# Altium PCB Anahata_Control_PCB.PcbDoc
Units mm, origin at the board's own origin, x right, y up, seen from the top; angles counter-clockwise.
Board outline 21.04 x 34.42 mm, 4 copper layers (Top Layer, Layer 1, Layer 2, Bottom Layer), stack 0.603 mm thick; 34 components, 48 nets, 137 pads, 36 vias.
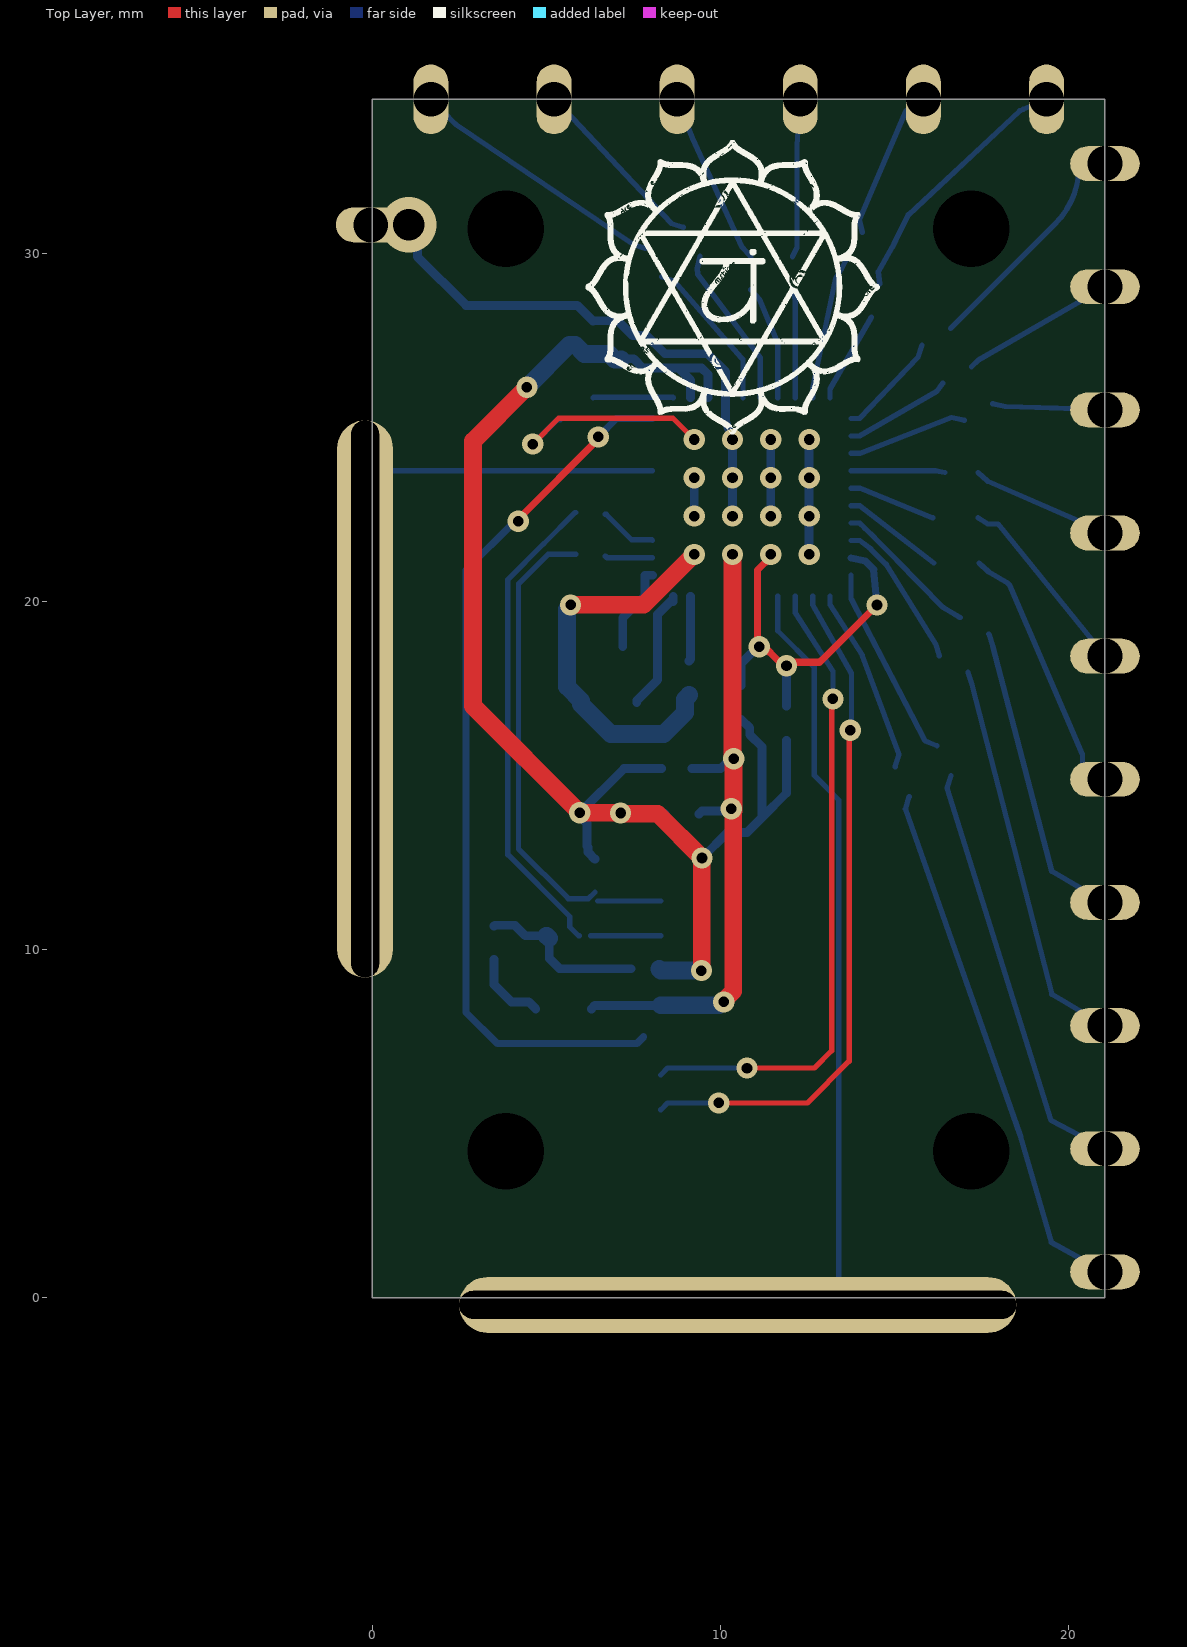
[diagram p0: Top Layer view]
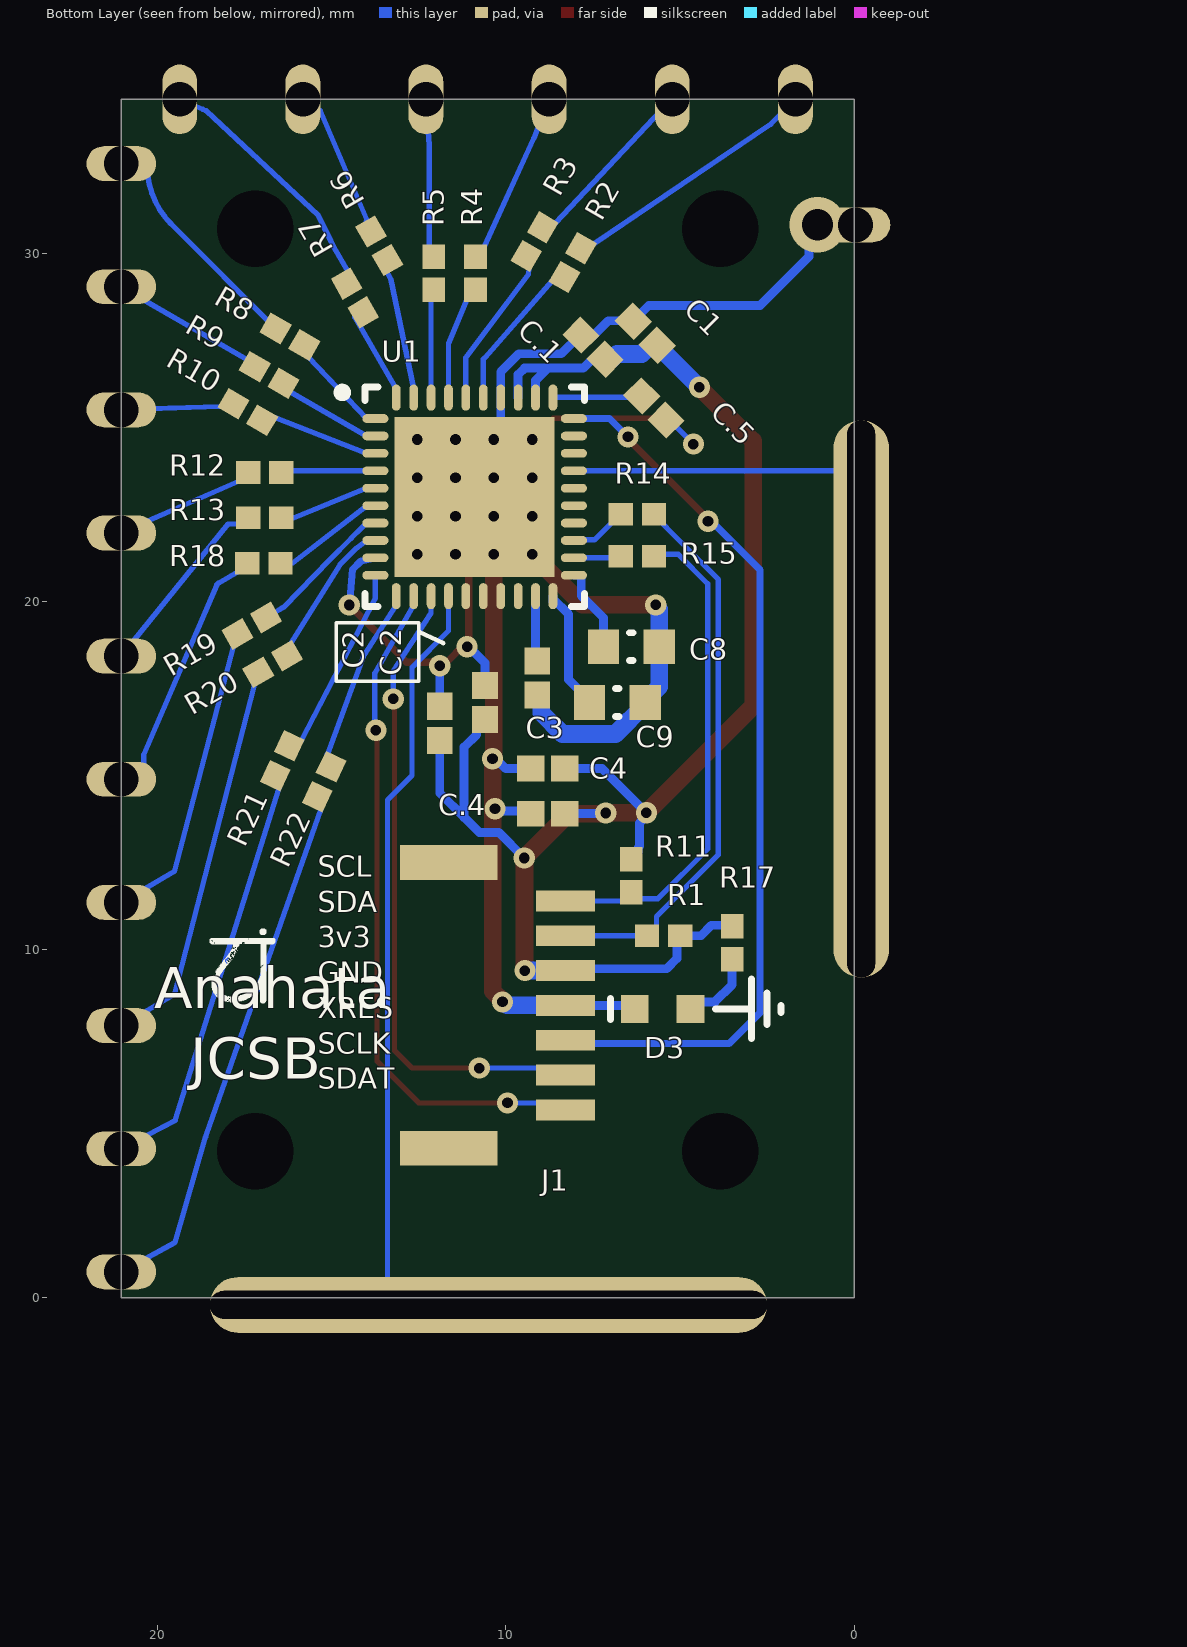
[diagram p1: Bottom Layer view, seen from below]

## Layer stack, top to bottom
Top Solder: solder mask 0.0102, Solder Resist, Dk 3.5
Top Layer: signal copper 0.0356
Dielectric 2: prepreg 0.0711, PP-006, Dk 4.1
Layer 1: signal copper 0.035
Dielectric 1: dielectric 0.32, FR-4, Dk 4.8
Layer 2: signal copper 0.035
Dielectric 3: prepreg 0.0711, PP-006, Dk 4.1
Bottom Layer: signal copper 0.0356
Bottom Solder: solder mask 0.0102, Solder Resist, Dk 3.5

## Board outline
0,0 21.044,0 21.044,34.417 0,34.417

## Design rules (kind name [scope] priority, off if disabled: settings)
BoardOutlineClearance [All] p1: gap=0.254 ignorepadtopadclearanceinfootprint=FALSE except(0: Arc-SplitContinuation Track-SplitContinuation SMDPad-SplitContinuation THPad-SplitContinuation Via-SplitContinuation Fill-SplitContinuation Poly-SplitContinuation Region-SplitContinuation Text-SplitContinuation; 0.508: Poly-OutlineEdge Poly-CavityEdge Poly-CutoutEdge Poly-SplitBarrior)
Clearance [All] p1: gap=0.152 ignorepadtopadclearanceinfootprint=FALSE except(0.305: Arc-Hole Track-Hole SMDPad-Hole THPad-Hole Via-Hole Fill-Hole Poly-Hole Region-Hole)
HoleSize [All] p1: absolutevalues=TRUE maxlimit=6.3 minlimit=0.3 maxpercent=80.000 minpercent=20.000
MinimumAnnularRing [IsVia] p1: minimumring=0.152
MinimumSolderMaskSliver [All] p1: minsoldermaskwidth=0.178
PolygonConnect PolygonConnect_1 [All] p1: thpad.connectstyle=Relief thpad.reliefconductorwidth=0.254 thpad.reliefentries=4 thpad.polygonreliefangle="90 Angle" thpad.airgapwidth=0.254 smdpad.connectstyle=Direct smdpad.reliefconductorwidth=0.254 smdpad.reliefentries=4 smdpad.polygonreliefangle="90 Angle" smdpad.airgapwidth=0.254 via.connectstyle=Direct via.reliefconductorwidth=0.254 via.reliefentries=4 via.polygonreliefangle="90 Angle" via.airgapwidth=0.254
PolygonConnect gnd_stitch_via [InNet('GND') vs InNet('GND')] p2: thpad.connectstyle=Relief thpad.reliefconductorwidth=0.254 thpad.reliefentries=4 thpad.polygonreliefangle="90 Angle" thpad.airgapwidth=0.254 smdpad.connectstyle=Relief smdpad.reliefconductorwidth=0.254 smdpad.reliefentries=4 smdpad.polygonreliefangle="90 Angle" smdpad.airgapwidth=0.254 via.connectstyle=Direct via.reliefconductorwidth=0.254 via.reliefentries=4 via.polygonreliefangle="90 Angle" via.airgapwidth=0.254
PolygonConnect gnd_ties [InComponentClass('net_ties')] p3: connectstyle=Direct reliefconductorwidth=0.254 reliefentries=4 polygonreliefangle="90 Angle" airgapwidth=0.254
RoomDefinition CapSense [InComponentClass('CapSense')] p1: confinementstyle=ConfineOut formatcopy=TRUE lockcomponents=FALSE outline -29.502,-36.993 21.298,-36.993 21.298,-11.593 -29.502,-11.593
RoomDefinition CY8C4124LQI-S413 [InComponentClass('CY8C4124LQI-S413')] p2: confinementstyle=ConfineOut formatcopy=TRUE lockcomponents=FALSE outline 29.6,-25.3 34.3,-25.3 34.3,-20.2 29.6,-20.2
RoomDefinition Power [InComponentClass('Power')] p3: confinementstyle=ConfineOut formatcopy=TRUE lockcomponents=FALSE outline 45.733,-36.993 96.533,-36.993 96.533,-11.593 45.733,-11.593
RoutingVias [All] p1: holewidth=0.711 width=1.27 viastyle="Through Hole" minholewidth=0.305 minwidth=0.61 maxholewidth=1.27 maxwidth=2.54
SilkToSilkClearance [All] p1: silktosilkclearance=0.102
SilkToSolderMaskClearance [IsPad] p1: minsilkscreentomaskgap=0.178 clearancetoexposedcopper=TRUE
SolderMaskExpansion [All] p1: expansion=0.102 istentingtop=FALSE
Width [All] p1: maxlimit=3.556 minlimit=0.152 preferedwidth=0.254 toplayer_maxwidth=2.54 midlayer1_maxwidth=2.54 midlayer2_maxwidth=2.54 minimp=50.000000 maximp=50.000000 favimp=50.000000
26 further rules are at their usual default settings.

## Classes and differential pairs
component class Power: C4 C.4 D3 J1 R17
component class CY8C4124LQI-S413: C1 C2 C.1 C.2 C.5 R1 R11 R14 R15 U3
component class CapSense: C3 C8 C9 R2 R3 R4 R5 R6 R7 R8 R9 R10 R12 R13 R18 R19 R20 R21 R22

## Components (designator, comment, footprint, x,y, rotation, side; value= is the part's Value field where it differs from the comment)
C1 "1uF" CAPC1005X56X25ML10T15 6,27.7 r225 bottom
C2 "1uF" CAPC1005X56X25ML10T15 11.9,16.5 r90 bottom
C3 "2.2nF" CAPC1005X56X25ML10T15 9.1,17.8 r270 bottom
C4 "1uF" CAPC1005X56X25ML10T15 8.8,15.2 r0 bottom
C8 "470pF" CAPC0603(1608)100_N 6.4,18.7 r180 bottom
C9 "470pF" CAPC0603(1608)100_N 6.8,17.1 r180 bottom
C.1 "0.1uF" CAPC1005X56X25ML10T15 7.5,27.3 r225 bottom
C.2 "0.1uF" CAPC1005X56X25ML10T15 10.6,17.1 r90 bottom
C.4 "0.1uF" CAPC1005X56X25ML10T15 8.8,13.9 r0 bottom
C.5 "0.1uF" CAPC1005X56X25ML10T15 5.754,25.554 r225 bottom
D3 "150060BS75000" 0603_A 5.5,8.3 r180 bottom
J1 "BM07B-NSHSS-TBT (LF)(SN)" "BM07B-NSHSS-TBT (LF)(SN)" 16.288,-1.6 r270 bottom
R1 "4.7k" RESC1005X40X25ML05T10 5.475,10.4 r180 bottom
R2 "RC0402JR-072KL" RESC1005X40X25ML05T10 8.081,29.729 r300 bottom
R3 "RC0402JR-072KL" RESC1005X40X25ML05T10 9.181,30.329 r300 bottom
R4 "RC0402JR-072KL" RESC1005X40X25ML05T10 10.875,29.425 r270 bottom
R5 "RC0402JR-072KL" RESC1005X40X25ML05T10 12.075,29.425 r270 bottom
R6 "RC0402JR-072KL" RESC1005X40X25ML05T10 13.638,30.211 r240 bottom
R7 "RC0402JR-072KL" RESC1005X40X25ML05T10 14.337,28.711 r240 bottom
R8 "RC0402JR-072KL" RESC1005X40X25ML05T10 16.2,27.6 r30 bottom
R9 "RC0402JR-072KL" RESC1005X40X25ML05T10 16.8,26.5 r30 bottom
R10 "RC0402JR-072KL" RESC1005X40X25ML05T10 17.411,25.438 r30 bottom
R11 "4.7k" RESC1005X40X25ML05T10 6.4,12.125 r90 bottom
R12 "RC0402JR-072KL" RESC1005X40X25ML05T10 16.925,23.7 r0 bottom
R13 "RC0402JR-072KL" RESC1005X40X25ML05T10 16.925,22.4 r0 bottom
R14 "330" RESC1005X40X25ML05T10 6.225,22.5 r180 bottom
R15 "330" RESC1005X40X25ML05T10 6.225,21.3 r180 bottom
R17 "330" RESC1005X40X25ML05T10 3.5,10.2 r270 bottom
R18 "RC0402JR-072KL" RESC1005X40X25ML05T10 16.95,21.1 r0 bottom
R19 "RC0402JR-072KL" RESC1005X40X25ML05T10 17.3,19.3 r330 bottom
R20 "RC0402JR-072KL" RESC1005X40X25ML05T10 16.7,18.2 r330 bottom
R21 "RC0402JR-072KL" RESC1005X40X25ML05T10 16.422,15.424 r295 bottom
R22 "RC0402JR-072KL" RESC1005X40X25ML05T10 15.222,14.824 r295 bottom
U1 "CY8C4124LQI-S413" CY8C4125LQS-S423 14.05,26.15 r180 bottom

## Footprints (in the part's own frame and the unit in brackets; to place one, negate y for a bottom-side part, rotate by r counter-clockwise, add the part's x,y. Pads: shape width x height; smd on the part's side, far side on the other; paste and mask are expansions set on the pad)
0603_A [mm] "Chip LED, 2-Leads, Body 1.6x0.8mm, IPC Medium Density"
  rect 0.8x0.8 smd: 1(-0.8,0) 2(0.8,0)
  silkscreen extent -1.5,-0.3 -1.5,0.3, body extent -0.8,-0.4 0.8,0.4, height 0.7
"BM07B-NSHSS-TBT (LF)(SN)" [mm]
  rect 1x2.8 smd paste-2.54 mask+0.1: 0(-14.1,4.65) 0(-5.9,4.65)
  rect 0.6x1.7 smd paste-2.54 mask+0.1: 1(-13,8) 2(-12,8) 3(-11,8) 4(-10,8) 5(-9,8) 6(-8,8) 7(-7,8)
  body extent -14.5,3.3 -5.5,8.25, height 6
CAPC0603(1608)100_N [mm] "Chip Capacitor, Body 1.6x0.8mm, Height 1.0mm, IPC Medium Density"
  rect 0.9x1 smd: 1(-0.8,0) 2(0.8,0)
  silkscreen extent -0.05,-0.4 0.05,0.4, body extent -0.88,-0.48 0.88,0.47, height 1
CAPC1005X56X25ML10T15 [mm] "Chip Capacitor, 2-Leads, Body 1.00x0.50mm, IPC Low Density"
  rect 0.78x0.74 smd: 1(-0.49,0) 2(0.49,0)
  body extent -0.55,-0.3 0.55,0.3, height 0.56
CY8C4125LQS-S423 [mm] "QFN 40 pin PSoC 4100S"
  oval 0.75x0.25 smd: 1(0.3,-0.9) 2(0.3,-1.4) 3(0.3,-1.9) 4(0.3,-2.4) 5(0.3,-2.9) 6(0.3,-3.4) 7(0.3,-3.9) 8(0.3,-4.4) 9(0.3,-4.9) 10(0.3,-5.4) 21(6,-5.4) 22(6,-4.9) 23(6,-4.4) 24(6,-3.9) 25(6,-3.4) 26(6,-2.9) 27(6,-2.4) 28(6,-1.9) 29(6,-1.4) 30(6,-0.9)
  oval 0.25x0.75 smd: 11(0.9,-6) 12(1.4,-6) 13(1.9,-6) 14(2.4,-6) 15(2.9,-6) 16(3.4,-6) 17(3.9,-6) 18(4.4,-6) 19(4.9,-6) 20(5.4,-6) 31(5.4,-0.3) 32(4.9,-0.3) 33(4.4,-0.3) 34(3.9,-0.3) 35(3.4,-0.3) 36(2.9,-0.3) 37(2.4,-0.3) 38(1.9,-0.3) 39(1.4,-0.3) 40(0.9,-0.3)
  rect 4.6x4.6 smd: 41(3.15,-3.15)
  silkscreen extent -0.78,-6.3 6.3,0, body extent 0.15,-6.15 6.15,-0.15, height 0.6
RESC1005X40X25ML05T10 [mm] "Chip Resistor, 2-Leads, Body 1.00x0.50mm, IPC Low Density"
  rect 0.7x0.65 smd: 1(-0.475,0) 2(0.475,0)
  body extent -0.53,-0.27 0.53,0.28, height 0.4

## Part data
C1 C2 C3 C4 C.1 C.2 C.4 C.5: library part CMP-1034-02113-2, Manufacturer="AVX Interconnect / Elco", Part Number=04026D105KAT2A
C8 C9: library part CMP-1035-01661-1, "CAP 470pF 10V ±10% 0603 (1608 Metric) Thickness 1mm SMD", Case-EIA=0603, Case-Metric=1608, Rated Voltage="10 V", Tolerance=Â±10%, Max Thickness="1 mm", Technology=SMT
D3: library part CMP-1426-00003-1, "SMD mono-color Chip LED, WL-SMCW, Blue", Color=Blue, Manufacturer="Wuerth Elektronik", ComponentLink1Description="Manufacturer URL", ComponentLink1URL=http://www.we-online.com, ComponentLink2Description=Datasheet, ComponentLink2URL=http://katalog.we-online.com/led/datasheet/150060BS75000.pdf, PackageReference=0603_A, PartNumber=150060BS75000
R1 R11 R14 R15 R17: library part CMP-2002-07972-1, Manufacturer="Yageo / Phycomp", Part Number=RC0402JR-072KL
R2 R3 R4 R5 R6 R7 R8 R9 R10 R12 R13 R18 R19 R20 R21 R22: library part CMP-2002-07972-1, Manufacturer="Yageo / Phycomp", Part Number=RC0402JR-072KL

## Free pads (board coordinates)
  round 0 hole 2.2: 2(3.844,4.217) 2(3.844,30.7) 2(17.2,4.217) 2(17.2,30.7)
  oval 1.6x16 hole 0.8 slot 16 at 90 deg: 4(-0.2,17.2)
  oval 2x1 hole 1: 4(-0.038,30.812) 4(21.044,0.748) 4(21.044,4.284) 4(21.044,7.82) 4(21.044,11.356) 4(21.044,14.892) 4(21.044,18.428) 4(21.044,21.964) 4(21.044,29.035) 4(21.044,32.571) 4(21.044,25.5)
  oval 1x2 hole 1: 4(1.69,34.417) 4(5.226,34.417) 4(8.76,34.417) 4(12.297,34.417) 4(15.831,34.417) 4(19.367,34.417)
  oval 16x1.6 hole 0.8 slot 16 at 0 deg: 4(10.5,-0.2)

## Via types
v1: diameter 0.61/0.61/0.61/0.61 (per signal layer), hole 0.305, Top Layer to Bottom Layer, 19 vias
v2: diameter 0.61, hole 0.305, Top Layer to Bottom Layer, 16 vias
v3: diameter 1.6, hole 0.9, Top Layer to Bottom Layer, 1 vias

## Nets (pads, with @x,y where several pads share a name; then routed paths per layer and width w, separated by ;. In a path a pad name is that pad's centre, name@x,y a point inside that pad or via, vN(x,y) a via of type N, cw(c..) or ccw(c..) an arc to the next point about the centre after c; other vN are vias at no path point)
+3v3: C1.2 C2.1 C4.1 C.1.2 C.2.1 C.4.1 J1.3 R1.2 R11.2 R17.1 U1.32 U1.33 | length 48.6
  Top Layer w0.508: v1(4.445,26.149) 2.9,24.603 2.9,16.997 v1(5.966,13.931) ; v1@5.972,13.925 5.975,13.928 7.133,13.928 7.155,13.905 8.202,13.905 v1(9.475,12.632) 9.466,12.623 9.466,9.409 v1(9.457,9.4)
  Bottom Layer w0.254: R17.1 3.525,10.7 4.1,10.7 4.4,10.4 R1.2 ; R1.2@5.087,10.329 5.087,9.751 5.385,9.453 J1.3@7.444,9.453 ; R11.2 6.202,12.798 6.202,12.939 6.169,12.972 6.169,13.632 5.966,13.835 v1(5.966,13.931) 7.235,15.2 C4.1 ; v1(7.136,13.925) 7.148,13.912 8.398,13.912 C.4.1@8.41,13.9 ; C.1.2 7.168,26.968 7.511,26.968 7.779,26.7 8.8,26.7 ; U1.32 9.148,25.852 9.148,26.352 8.8,26.7 ; v1(9.475,12.632) 10.211,13.368 10.768,13.368 10.969,13.569 11.2,13.8 ; U1.33 9.65,26.515 9.465,26.7 8.8,26.7 ; C.2.1 10.843,16.367 10.843,16.176 11.2,15.819 11.2,13.8 ; C2.1 11.9,14.5 11.2,13.8
  Bottom Layer w0.508: v1(4.445,26.149) 4.447,26.149 5.652,27.354 C1.2 5.668,27.368 5.832,27.368 6.097,27.103 6.812,27.103 6.975,26.939 7.139,26.939 C.1.2 ; R1.2 5.016,10.4 R1.2@5.087,10.329 ; J1.3@8.242,9.446 J1.3 v1(9.457,9.4)
CintA: C9.1 U1.20 | length 3.6
  Bottom Layer w0.254: C9.1 7.6,17.15 8.2,17.75 8.2,19.627 U1.20@8.65,20.077 ; U1.20@8.648,20.002 8.65,20.004 U1.20@8.65,20.077 ; U1.20 U1.20@8.65,20.077
CintB: C8.1 U1.21 | length 2.5
  Bottom Layer w0.254: C8.1 7.2,19.525 7.84,20.165 7.84,20.748 7.842,20.75 U1.21
Cmod: C3.1 U1.19 | length 1.9
  Bottom Layer w0.254: C3.1 9.148,18.338 9.148,20.148 U1.19
GND: C1.1 C2.2 C3.2 C4.2 C8.2 C9.2 C.1.1 C.2.2 C.4.2 C.5.2 D3.1 J1.4 pad.4@-0.038,30.812 U1.9 U1.34 U1.41 | length 70.4
  Top Layer w0.152: v1(4.617,24.517) 5.358,25.258 8.642,25.258 v2(9.25,24.65)
  Top Layer w0.203: v1(11.117,18.7) 11.069,18.748 11.069,20.902 11.45,21.283 v2(11.45,21.35) ; v1@11.16,18.8 11.74,18.22 11.868,18.22 11.9,18.252 12.747,18.252 12.852,18.252 13.001,18.401 v1(14.497,19.898)
  Top Layer w0.508: v1(5.7,19.9) 7.8,19.9 v2(9.25,21.35) ; v1(10.1,8.5) 10.1,8.527 10.375,8.803 10.375,13.96 10.316,14.02 v1(10.316,14.047) ; v2(10.35,21.35) 10.35,15.591 10.365,15.576 10.365,15.504 v1(10.385,15.485) 10.38,15.48 v1@10.38,13.992
  Bottom Layer w0.152: v1(4.617,24.517) 5.307,25.207 C.5.2
  Bottom Layer w0.203: U1.9 14.168,21.154 14.404,20.918 v1(14.497,19.898)
  Bottom Layer w0.254: v3(1.054,30.812) 1.302,30.564 1.302,29.898 2.7,28.5 5.893,28.5 C1.1 6.361,28.061 7.06,28.061 7.489,27.632 7.832,27.632 C.1.1 ; D3.1 6.4,8.4 J1.4 ; C.1.1@7.861,27.661 8.412,27.109 9.63,27.109 10.15,26.59 U1.34 10.15,25.173 v2(10.35,24.65) v2(10.35,23.55) v2(10.35,22.45) ; C4.2@9.19,15.2 10.004,15.2 10.288,15.485 v1(10.385,15.485) ; v2(9.25,22.45) v2(9.25,23.55) ; C.4.2@9.39,13.9 9.469,13.979 10.248,13.979 v1(10.316,14.047) ; C.2.2 10.6,18.227 11.072,18.7 v1(11.117,18.7) ; v2(11.45,22.45) v2(11.45,23.55) v2(11.45,24.65) ; C2.2 v1(11.9,18.152) v1@11.9,18.056 ; v2(12.55,21.35) v2(12.55,22.45) v2(12.55,23.55) v2(12.55,24.65)
  Bottom Layer w0.508: v1(5.7,19.9) 5.7,19.873 5.6,19.773 C8.2 5.6,17.55 6,17.15 C9.2 6,17.05 6.856,16.194 8.374,16.194 8.984,16.803 8.984,17.194 C3.2 ; J1.4 9.973,8.4 10.073,8.5 v1(10.1,8.5)
NetC.5_1: C.5.1 U1.31 | length 2.3
  Bottom Layer w0.152: C.5.1@6.346,25.846 6.361,25.861 8.639,25.861 U1.31
NetD3_2: D3.2 R17.2 | length 2.2
  Bottom Layer w0.254: R17.2 3.506,9.719 3.506,8.994 4,8.5 4.5,8.5 D3.2
NetR14_1: R14.1 U1.23 | length 1.7
  Bottom Layer w0.152: R14.1 6.725,22.5 7.456,21.769 8.031,21.769 U1.23
NetR15_1: R15.1 U1.22 | length 1.4
  Bottom Layer w0.152: R15.1 6.75,21.25 U1.22
RX0: R8.1 U1.1 | length 3.1
  Bottom Layer w0.152: U1.1 14,25.25 15.676,27.01 R8.1
RX0_PAD: pad.4@21.044,32.571 R8.2 | length 6.9
  Bottom Layer w0.152: R8.2 19.611,30.838 ccw(c17.949,32.5) 20.3,32.5 cw(c20.471,32.329) 20.471,32.571 pad.4@21.044,32.571
RX1: R9.1 U1.2 | length 3.1
  Bottom Layer w0.152: U1.2 14,24.75 16.209,26.026 R9.1
RX1_PAD: pad.4@21.044,29.035 R9.2 | length 4.5
  Bottom Layer w0.152: R9.2 17.415,26.933 20.723,28.843 pad.4@21.044,29.035
RX2: R10.1 U1.3 | length 3.5
  Bottom Layer w0.152: U1.3 14,24.25 16.638,25.279 R10.1
RX2_PAD: pad.4@21.044,25.5 R10.2 | length 3.2
  Bottom Layer w0.152: R10.2 18.184,25.596 20.714,25.518 pad.4@21.044,25.5
RX3: R12.1 U1.4 | length 2.7
  Bottom Layer w0.152: U1.4 16.176,23.75 R12.1
RX3_PAD: pad.4@21.044,21.964 R12.2 | length 4.1
  Bottom Layer w0.152: R12.2 17.674,23.451 20.717,22.12 pad.4@21.044,21.964
RX4: R13.1 U1.5 | length 2.5
  Bottom Layer w0.152: U1.5 14,23.25 16.1,22.4
RX4_PAD: pad.4@21.044,18.428 R13.2 | length 5.5
  Bottom Layer w0.152: R13.2 17.674,22.224 17.975,22.224 20.714,18.836 20.742,18.802 pad.4@21.044,18.428
RX5: R18.1 U1.6 | length 2.9
  Bottom Layer w0.152: U1.6 14,22.75 16.125,21.1
RX5_PAD: pad.4@21.044,14.892 R18.2 | length 7.5
  Bottom Layer w0.152: R18.2 17.699,20.851 18.257,20.525 18.3,20.476 20.4,15.6 20.4,15.3 20.808,14.892 pad.4@21.044,14.892
RX6: R19.1 U1.7 | length 4.2
  Bottom Layer w0.152: U1.7 14,22.25 14.146,22.104 14.441,21.815 15.065,21.191 16.376,19.84 16.378,19.839 16.401,19.825 16.654,19.679 R19.1
RX6_PAD: pad.4@21.044,11.356 R19.2 | length 8.8
  Bottom Layer w0.152: R19.2 17.824,18.71 19.518,12.248 pad.4@21.044,11.356
RX7: R20.1 U1.8 | length 4.3
  Bottom Layer w0.152: U1.8 14,21.75 14.315,21.51 14.76,21.065 16.176,18.79 R20.1
RX7_PAD: pad.4@21.044,7.82 R20.2 | length 11.3
  Bottom Layer w0.152: R20.2 17.224,17.61 19.52,8.718 pad.4@21.044,7.82
RX8: R21.1 U1.10 | length 5.6
  Bottom Layer w0.152: U1.10 13.75,20.125 13.75,20.088 13.767,20.055 15.88,15.998 R21.1
RX8_PAD: pad.4@21.044,4.284 R21.2 | length 12.1
  Bottom Layer w0.152: R21.2 16.513,14.64 19.499,5.093 pad.4@21.044,4.284
RX9: R22.1 U1.11 | length 5.4
  Bottom Layer w0.152: U1.11 13.15,19.9 14.072,18.459 15.131,15.608 R22.1
RX9_PAD: pad.4@21.044,0.748 R22.2 | length 15.3
  Bottom Layer w0.152: R22.2 15.313,14.04 18.597,4.708 cw(c17.2,4.217) 18.622,4.631 19.506,1.592 pad.4@21.044,0.748
SCL: J1.1 R11.1 R15.2 | length 14.3
  Bottom Layer w0.152: R15.2@5.85,21.35 5.05,21.35 4.205,20.505 4.205,12.895 5.636,11.464 6.214,11.464 R11.1 ; R11.1@6.475,11.4 J1.1
SCLK_SWD: J1.6 U1.13 | length 18.6
  Top Layer w0.152: v1(10.767,6.6) 12.7,6.6 13.2,7.1 13.2,17.167 v1(13.233,17.2)
  Bottom Layer w0.152: J1.6 8.488,6.6 v1(10.767,6.6) ; U1.13 12.15,19.675 13.233,18.004 v1(13.233,17.2)
SDA: J1.2 R1.1 R14.2 | length 15.9
  Bottom Layer w0.152: R14.2@5.85,22.55 5.825,22.55 4.93,21.655 4.924,21.655 3.9,20.631 3.9,12.73 5.676,10.954 5.676,10.649 5.925,10.4 R1.1 ; R1.1@6.275,10.4 J1.2
SDAT: J1.7 U1.12 | length 19.7
  Top Layer w0.152: v1(9.955,5.6) 12.5,5.6 13.7,6.8 13.7,16.267 v1(13.733,16.3)
  Bottom Layer w0.152: J1.7 8.488,5.6 v1(9.955,5.6) ; U1.12 12.65,19.9 13.767,17.933 13.767,16.333 v1(13.733,16.3)
SFX: pad.4@-0.2,17.2 U1.27 | length 13.8
  Bottom Layer w0.152: pad.4@0,17.2 pad.4@0,22.897 ; pad.4@0,23.519 0.231,23.75 U1.27
SFY: pad.4@10.5,-0.2 U1.14 | length 23.1
  Bottom Layer w0.152: pad.4@10.5,0 pad.4@12.547,0 ; U1.14 11.65,19.156 12.7,18.106 12.7,15 13.4,14.3 13.4,0.469 pad.4@12.931,0
TX0: R2.2 U1.35 | length 4.5
  Bottom Layer w0.152: R2.2 8.671,29.205 10.601,26.999 10.65,26.95 U1.35
TX0_PAD: pad.4@1.69,34.417 R2.1 | length 7.5
  Bottom Layer w0.152: pad.4@1.69,34.417 1.995,34.109 2.017,34.087 2.4,33.7 7.491,30.253 R2.1
TX1: R3.2 U1.36 | length 4.7
  Bottom Layer w0.152: R3.2 9.34,29.556 9.354,29.396 11.15,27 U1.36
TX1_PAD: pad.4@5.226,34.417 R3.1 | length 5.3
  Bottom Layer w0.152: pad.4@5.226,34.417 5.537,34.109 8.591,30.853 R3.1
TX2: R4.2 U1.37 | length 3.3
  Bottom Layer w0.152: R4.2 11.124,28.676 11.65,27.4 U1.37
TX2_PAD: pad.4@8.76,34.417 R4.1 | length 5
  Bottom Layer w0.152: pad.4@8.76,34.417 8.89,34.087 9.2,33.3 10.626,30.174 R4.1
TX3: R5.2 U1.38 | length 3.1
  Bottom Layer w0.152: R5.2 12.15,28.676 U1.38
TX3_PAD: pad.4@12.297,34.417 R5.1 | length 4.5
  Bottom Layer w0.152: R5.1 12.2,30.174 12.2,33.1 12.272,34.087 pad.4@12.297,34.417
TX4: R6.2 U1.39 | length 4.1
  Bottom Layer w0.152: U1.39 12.65,26.1 13.308,29.258 13.47,29.539 R6.2@13.6,29.78
TX4_PAD: pad.4@15.831,34.417 R6.1 | length 3.8
  Bottom Layer w0.152: R6.1@14.075,30.603 13.996,30.965 15.331,34.087
TX5: R7.2 U1.40 | length 2.6
  Bottom Layer w0.152: U1.40 13.15,26.1 R7.2@14.339,28.162
TX5_PAD: pad.4@19.367,34.417 R7.1 | length 7.4
  Bottom Layer w0.152: R7.1 14.531,29.464 14.94,30.172 15.034,30.361 15.4,31.1 18.6,34.087 18.702,34.13 pad.4@19.367,34.417
XRES: J1.5 U1.30 | length 25.5
  Top Layer w0.203: v1(4.2,22.3) 4.2,22.364 6.497,24.661 v1(6.497,24.724)
  Bottom Layer w0.203: v1(4.2,22.3) 4.1,22.3 2.7,20.9 2.7,8.2 3.6,7.3 7.6,7.3 J1.5@7.8,7.5 ; v1(6.497,24.724) 7.022,25.25 U1.30
pads on no net: J1.0 U1.15 U1.16 U1.17 U1.18 U1.24 U1.25 U1.26 U1.28 U1.29

## Silkscreen, mask and mechanical layers (free items; w line width, h text height)
Top Overlay:
  drawing of 52 lines, arcs and shapes, not listed
Bottom Overlay:
  drawing of 11 lines, arcs and shapes, not listed
  text "Anahata /   JCSB" at 20.1,5.9 h2.03
  text "SCL / SDA / 3v3 / GND / XRES / SCLK / SDAT" at 15.4,5.8 h1.02
Mechanical 1:
  lines w0.203: 21.044,34.417 21.044,0 0,0 0,34.417 21.044,34.417 ; 21.044,34.417 21.044,34.417